# EAGLE board diy_drivermotor (EAGLE 7.1.0)
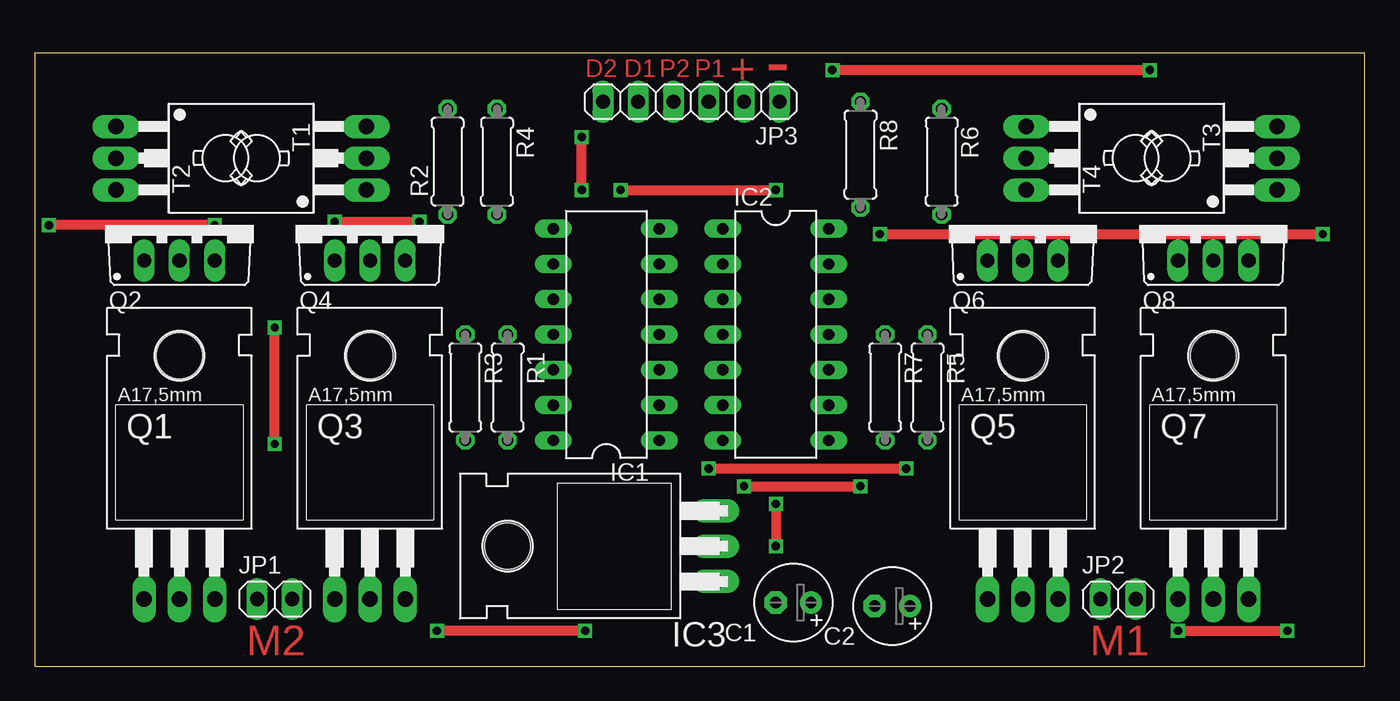
[diagram p0: board, top side]
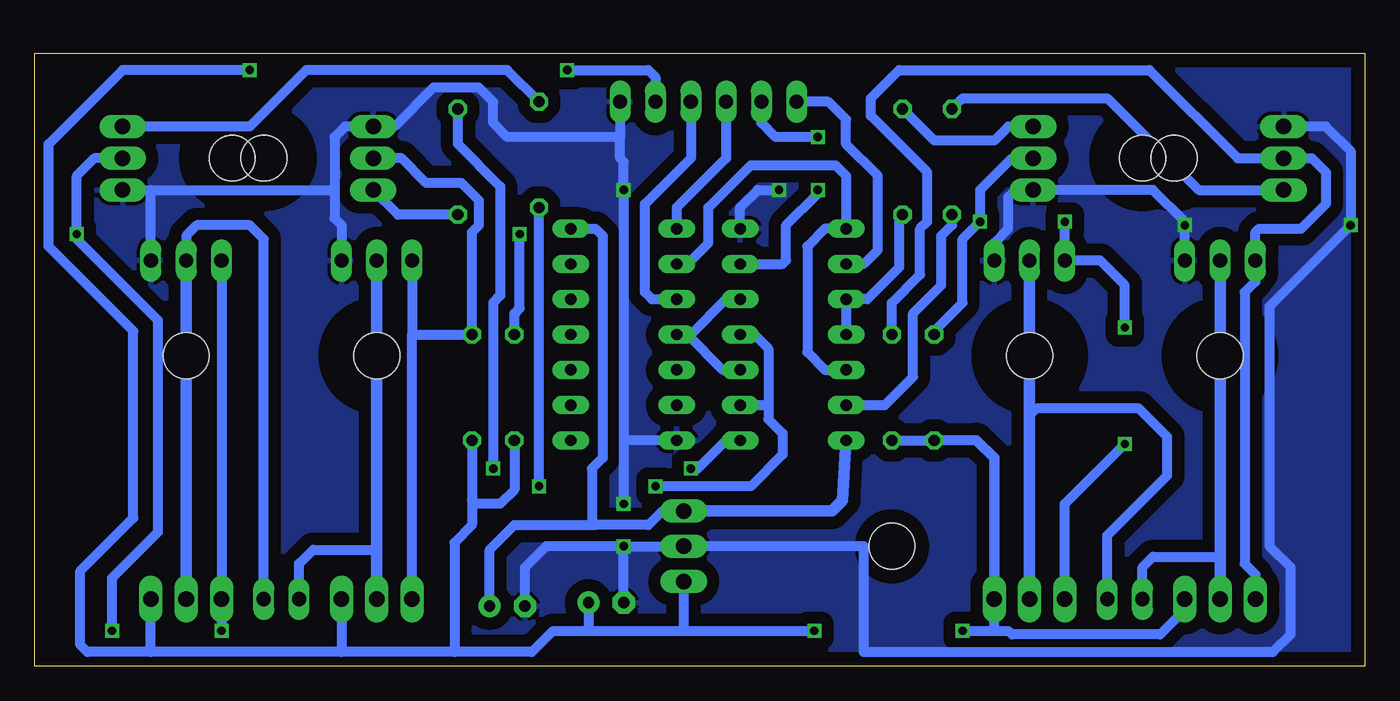
[diagram p1: board, bottom side, seen from below]

Size 95.74 x 44.12 mm. Coordinates in mm from the lower left corner, seen from the top.
Outline: 0,0 95.74,0 95.74,44.12 0,44.12 0,0
Copper layers (1*16): Top 0.035mm / dielectric 1.5mm / Bottom 0.035mm
Design rules "default *": minimum track width 10mil, minimum drill 24mil, track to track 35mil, track to pad 35mil, pad to pad 8mil, via to via 8mil, smd to smd 8mil, copper to edge 40mil, drill to drill 8mil, minimum pad ring 10mil, minimum via ring 8mil, stop-mask expansion 4mil, vias tented up to drill 0mil, thermal gap 10mil

## Footprints (pad centres in the part's own frame; a part is rotated, then mirrored left to right if it is on the bottom)
E2,5-6 = drill 0.813 pad 1.6: + -1.27,0 | drill 0.813 pad 1.6 octagon: - 1.27,0
DIL14 = drill 0.813 long: 1 -7.62,-3.81; 2 -5.08,-3.81; 3 -2.54,-3.81; 4 0,-3.81; 5 2.54,-3.81; 6 5.08,-3.81; 7 7.62,-3.81; 8 7.62,3.81; 9 5.08,3.81; 10 2.54,3.81; 11 0,3.81; 12 -2.54,3.81; 13 -5.08,3.81; 14 -7.62,3.81
TO220H = drill 1.118 long: 1 -2.54,-10.16; 2 0,-10.16; 3 2.54,-10.16 | hole 3.302: 0,4.826
1X02 = drill 1.016 long: 1 -1.27,0; 2 1.27,0
1X06 = drill 1.016 long: 1 -6.35,0; 2 -3.81,0; 3 -1.27,0; 4 1.27,0; 5 3.81,0; 6 6.35,0
TO220 = drill 1.118 long: 1 -2.54,-6.35; 2 0,-6.35; 3 2.54,-6.35 | hole 3.302: 0,11.176
TO220BV = drill 1.016 long: D 0,-2.54; G -2.54,-2.54; S 2.54,-2.54
0207/7 = drill 0.813 octagon: 1 -3.81,0; 2 3.81,0
TO126 = drill 1.118 long: 1 -2.286,-5.08; 2 0,-5.08; 3 2.286,-5.08 | hole 3.302: 0,5.08

## Placement (x,y rotation side)
C1  [E2,5-6]  54.61,4.57 180 top
C2  [E2,5-6]  61.72,4.32 180 top
IC1  7402N  [DIL14]  41.15,23.88 90 top
IC2  7404N  [DIL14]  53.34,23.88 270 top
IC3  7805T  [TO220H]  38.86,8.64 90 top
JP1  [1X02]  17.27,4.83 0 top
JP2  [1X02]  77.98,4.83 0 top
JP3  [1X06]  47.24,40.64 180 top
Q1  IRF9530  [TO220]  10.41,11.18 0 top
Q2  IRF540  [TO220BV]  10.41,31.75 0 top
Q3  IRF9530  [TO220]  24.13,11.18 0 top
Q4  IRF540  [TO220BV]  24.13,31.75 0 top
Q5  IRF9530  [TO220]  71.12,11.18 0 top
Q6  IRF540  [TO220BV]  71.12,31.75 0 top
Q7  IRF9530  [TO220]  84.84,11.18 0 top
Q8  IRF540  [TO220BV]  84.84,31.75 0 top
R1  10K  [0207/7]  34.04,20.07 270 top
R2  10K  [0207/7]  29.72,36.32 90 top
R3  10K  [0207/7]  30.99,20.07 270 top
R4  10K  [0207/7]  33.27,36.32 270 top
R5  10K  [0207/7]  64.26,20.07 270 top
R6  10K  [0207/7]  65.28,36.32 270 top
R7  10K  [0207/7]  61.21,20.07 270 top
R8  10K  [0207/7]  59.44,36.83 270 top
T1  BD139  [TO126]  10.92,36.58 270 top
T2  BD139  [TO126]  18.8,36.58 90 top
T3  BD139  [TO126]  76.45,36.58 270 top
T4  BD139  [TO126]  84.33,36.58 90 top

## Library data of the parts
C1 C2 R1-R8 = rcl
IC1 = 74xx-us
IC2 = 74xx-eu
IC3 = linear
JP1-JP3 = pinhead
Q1 Q3 Q5 Q7 = transistor-fet
Q2 Q4 Q6 Q8 = transistor-power
T1-T4 = transistor

## Nets
5V: C2.+ IC1.14 IC2.14 IC3.3
12V: C1.+ IC3.1 JP3.2 Q1.3 Q3.3 Q5.3 Q7.3 R1.2 R3.2 R5.2 R7.2
DIR1: IC1.6 JP3.5
DIR2: IC1.9 JP3.6
GND: C1.- C2.- IC1.7 IC2.7 IC3.2 JP3.1 Q2.S Q4.S Q6.S Q8.S T1.1 T2.1 T3.1 T4.1
N$1: JP1.1 Q1.2 Q2.D
N$2: JP1.2 Q3.2 Q4.D
N$6: JP2.1 Q5.2 Q6.D
N$7: R2.2 T1.3
N$8: R4.1 T2.3
N$9: Q3.1 Q4.G R3.1 T2.2
N$10: Q1.1 Q2.G R1.1 T1.2
N$11: JP2.2 Q7.2 Q8.D
N$13: IC1.8 IC1.12 IC2.2
N$16: IC1.10 IC1.11 R4.2
N$17: R8.1 T4.3
N$18: IC1.13 R2.1
N$19: R6.2 T3.3
N$20: Q5.1 Q6.G R5.1 T3.2
N$21: Q7.1 Q8.G R7.1 T4.2
N$22: IC1.1 R6.1
N$24: IC1.3 IC1.5 IC2.4
N$27: IC1.2 IC1.4 R8.2
PWM1: IC2.3 JP3.3
PWM2: IC2.1 JP3.4

## Tracks (layer width: path | path; a pad name or v marks a point on that pad's centre or on a via)
5V
  Bottom 0.711: IC2.14 55.37,31.5 54.86,30.99 54.86,14.99 55.63,14.22 55.63,10.41 55.37,10.16 | C2.+ 62.99,8.38 61.21,10.16 55.37,10.16 | IC3.3 50.55,11.18 51.56,10.16 55.37,10.16
  Bottom 0.813: IC3.3 38.35,11.18 37.59,11.94 IC1.14
12V  (via drill 0.6)
  Top 0.711: v39.62,2.54 v28.96,2.54 | v80.26,42.93 v57.4,42.93
  Bottom 0.711: Q1.3 12.95,4.06 14.73,2.29 25.4,2.29 25.65,2.54 26.67,2.54 | 26.67,2.54 Q3.3 | 87.38,1.02 Q7.3 | 55.88,2.54 58.42,2.54 59.94,1.02 65.53,1.02 | 55.88,2.54 49.28,2.54 | 49.28,2.54 v39.62,2.54 | v28.96,2.54 26.67,2.54 | IC3.1 49.02,2.79 49.28,2.54 | C1.+ 55.88,2.54 | R5.2 64.26,11.94 | 64.26,11.94 64.26,10.16 65.53,8.89 65.53,1.02 | Q5.3 73.66,1.02 | 64.26,11.94 64.01,11.68 62.23,11.68 61.21,12.7 R7.2 | JP3.2 51.05,42.42 51.56,42.93 v57.4,42.93 | v80.26,42.93 89.41,42.93 94.74,37.59 94.74,30.23 88.65,24.13 88.65,10.67 92.46,6.86 92.46,1.52 91.95,1.02 87.38,1.02 | 65.53,1.02 73.66,1.02 | 73.66,1.02 87.38,1.02 | R1.2 R3.2 27.94,16.26
  Bottom 0.762: Q3.3 26.67,14.99 27.94,16.26
DIR1  (via drill 0.6)
  Top 0.711: v39.37,34.29 v39.37,38.1
  Bottom 0.711: JP3.5 43.43,39.12 42.42,38.1 v39.37,38.1 | IC1.6 41.91,28.96 41.66,29.21 41.66,31.75 39.37,34.04 v39.37,34.29
DIR2
  Bottom 0.711: IC1.9 36.07,28.96 35.05,29.97 35.05,35.31 37.34,37.59 37.34,39.37 38.61,40.64 JP3.6
GND  (via drill 0.6)
  Top 0.711: v42.16,34.29 v53.34,34.29 | v53.34,11.68 v53.34,8.64 | v12.95,31.75 v1.02,31.75
  Bottom 0.711: Q8.S 87.38,34.29 | IC1.7 44.96,33.02 43.69,34.29 v42.16,34.29 | IC2.7 53.09,16.26 53.34,16.51 | 53.34,16.51 v53.34,34.29 53.34,36.32 53.59,36.58 53.59,38.1 | 53.34,16.51 v53.34,11.68 | v53.34,8.64 IC3.2 36.07,8.64 36.07,1.02 6.6,1.02 5.33,2.29 5.33,7.11 6.86,8.64 6.86,25.91 v1.02,31.75 1.02,37.08 2.79,38.86 T1.1 | v53.34,8.64 58.93,8.64 60.45,7.11 C2.- | C1.- v53.34,8.64 | T4.1 87.38,34.29 | 87.38,34.29 74.42,34.29 74.17,34.04 | 74.17,34.04 74.17,38.1 73.41,38.86 T3.1 69.85,38.86 67.06,41.66 63.75,41.66 62.74,40.64 62.74,39.12 61.72,38.1 53.59,38.1 | 74.17,34.04 74.17,32.26 73.66,31.75 Q6.S | JP3.1 53.59,38.1 | Q4.S 26.67,30.48 25.65,31.5 25.65,33.78 25.15,34.29 T2.1 15.24,34.29 12.95,32 v12.95,31.75 Q2.S
  pour Bottom: 0,44.2 95.76,44.2 95.76,0 0,0
N$1
  Bottom 0.711: JP1.1 16,7.11 15.24,7.87 10.41,7.87
  Bottom 0.813: Q2.D 10.41,7.87 Q1.2
N$2
  Bottom 0.711: JP1.2 18.54,9.4 14.22,13.72 14.22,16.51 16.26,18.54 23.62,18.54 24.13,18.03
  Bottom 0.813: Q3.2 24.13,18.03 Q4.D
N$6
  Bottom 0.711: JP2.1 76.71,7.37 75.69,8.38 71.12,8.38
  Bottom 0.813: Q6.D 71.12,8.38 Q5.2
N$7
  Bottom 0.711: R2.2 28.96,40.89 18.54,40.89 11.94,34.29 T1.3
N$8
  Bottom 0.711: T2.3 25.65,38.86 26.67,37.85 30.99,37.85 R4.1
N$9  (via drill 0.6)
  Top 0.711: v21.59,32 v27.69,32 | v17.27,16 v17.27,24.38
  Bottom 0.711: R3.1 30.99,24.13 28.96,26.16 28.96,30.73 v27.69,32 27.69,34.29 25.4,36.58 T2.2 | v21.59,32 Q4.G 19.05,29.21 17.27,27.43 v17.27,24.38 | Q3.1 21.59,11.68 v17.27,16
N$10
  Bottom 0.711: R1.1 34.04,26.16 32,28.19 32,31.5 31.5,32 31.5,35.56 35.56,39.62 35.56,40.89 33.53,42.93 15.49,42.93 9.14,36.58 T1.2 3.81,36.58 2.79,35.56 2.79,33.27 4.57,31.5 7.62,31.5 7.87,31.24 Q2.G 7.87,27.69 8.64,26.92 8.64,7.37 7.87,6.6 Q1.1
N$11
  Bottom 0.711: JP2.2 79.25,30.73 80.26,31.75 84.07,31.75 84.84,30.99 Q8.D
  Bottom 0.813: Q8.D Q7.2
N$13
  Bottom 0.711: IC1.12 38.86,21.34 40.13,22.61 40.13,30.23 38.86,31.5 IC1.8 37.34,35.31 38.1,36.07 44.2,36.07 47.24,33.02 47.24,30.48 48.77,28.96 IC2.2
N$16
  Bottom 0.711: IC1.11 IC1.10 35.81,26.42 33.53,28.7 33.53,32 33.27,32.26 R4.2
N$17
  Bottom 0.711: T4.3 80.26,38.86 76.2,42.93 61.72,42.93 R8.1
N$18
  Bottom 0.711: IC1.13 34.54,18.8 32.51,20.83 32.51,25.4 30.48,27.43 30.48,30.99 29.72,31.75 R2.1
N$19
  Bottom 0.711: R6.2 69.6,32.51 T3.3
N$20
  Bottom 0.711: T3.2 69.34,36.58 67.56,34.8 65.02,34.8 63.75,33.53 63.75,31.75 64.26,31.24 R5.1 68.58,23.88 | Q5.1 68.58,23.37 68.58,23.88 | Q6.G 68.58,23.88
N$21  (via drill 0.6)
  Top 0.711: v60.83,31.11 v92.71,31.11 | v82.3,2.54 v90.17,2.54
  Bottom 0.711: R7.1 61.21,25.4 60.83,25.78 v60.83,31.11 | T4.2 91.44,36.58 92.71,35.31 v92.71,31.11 92.71,30.73 86.87,24.89 86.87,9.65 90.17,6.35 v90.17,2.54 | v82.3,2.54 Q7.1 Q8.G
N$22  (via drill 0.6)
  Top 0.711: v48.51,14.22 v62.74,14.22
  Bottom 0.711: v48.51,14.22 48.01,14.22 45.97,16.26 IC1.1 | R6.1 65.28,37.59 62.23,34.54 62.23,26.67 62.74,26.16 v62.74,14.22
N$24
  Bottom 0.711: IC2.4 48.77,23.88 | 48.77,23.88 46.23,21.34 IC1.3 | 48.77,23.88 48.51,23.88 45.97,26.42 IC1.5
N$27  (via drill 0.6)
  Top 0.711: v51.05,12.95 v59.44,12.95
  Bottom 0.711: IC1.4 43.94,23.88 42.93,22.86 42.93,18.8 | 42.93,18.8 42.93,17.78 41.91,16.76 41.91,15.24 44.2,12.95 v51.05,12.95 | 43.94,18.8 IC1.2 42.93,18.8 | v59.44,12.95 R8.2
PWM1
  Bottom 0.711: JP3.3 48.51,36.58 51.82,33.27 51.82,26.92 51.31,26.42 IC2.3
PWM2
  Bottom 0.711: JP3.4 45.97,36.58 49.53,33.02 IC2.1

## Text on the board
Top: D2 | D1 | P2 | P1 | + | - | M2 | M1